# EAGLE board mainboard_eurobotics2010_r3 (EAGLE 4.16)
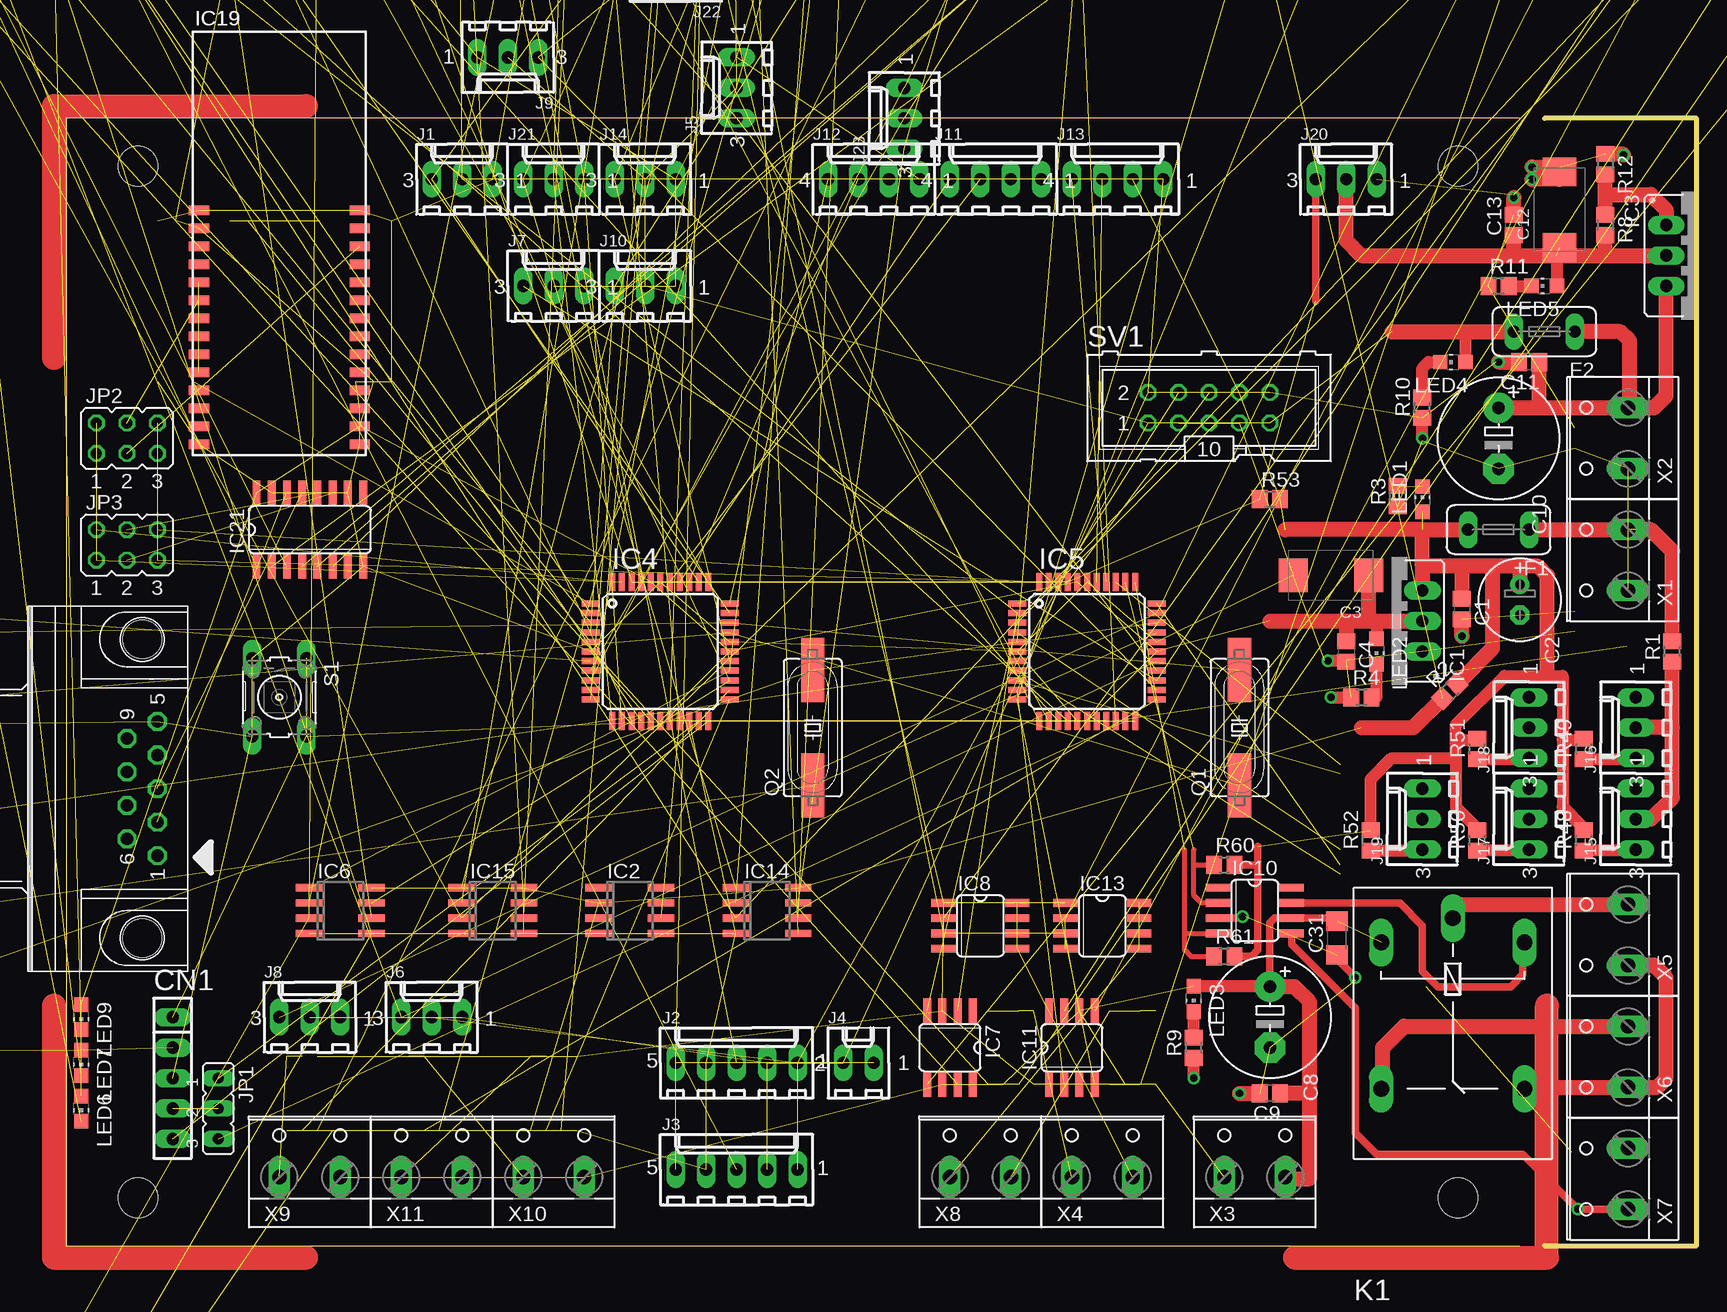
[diagram p0: board, top side]
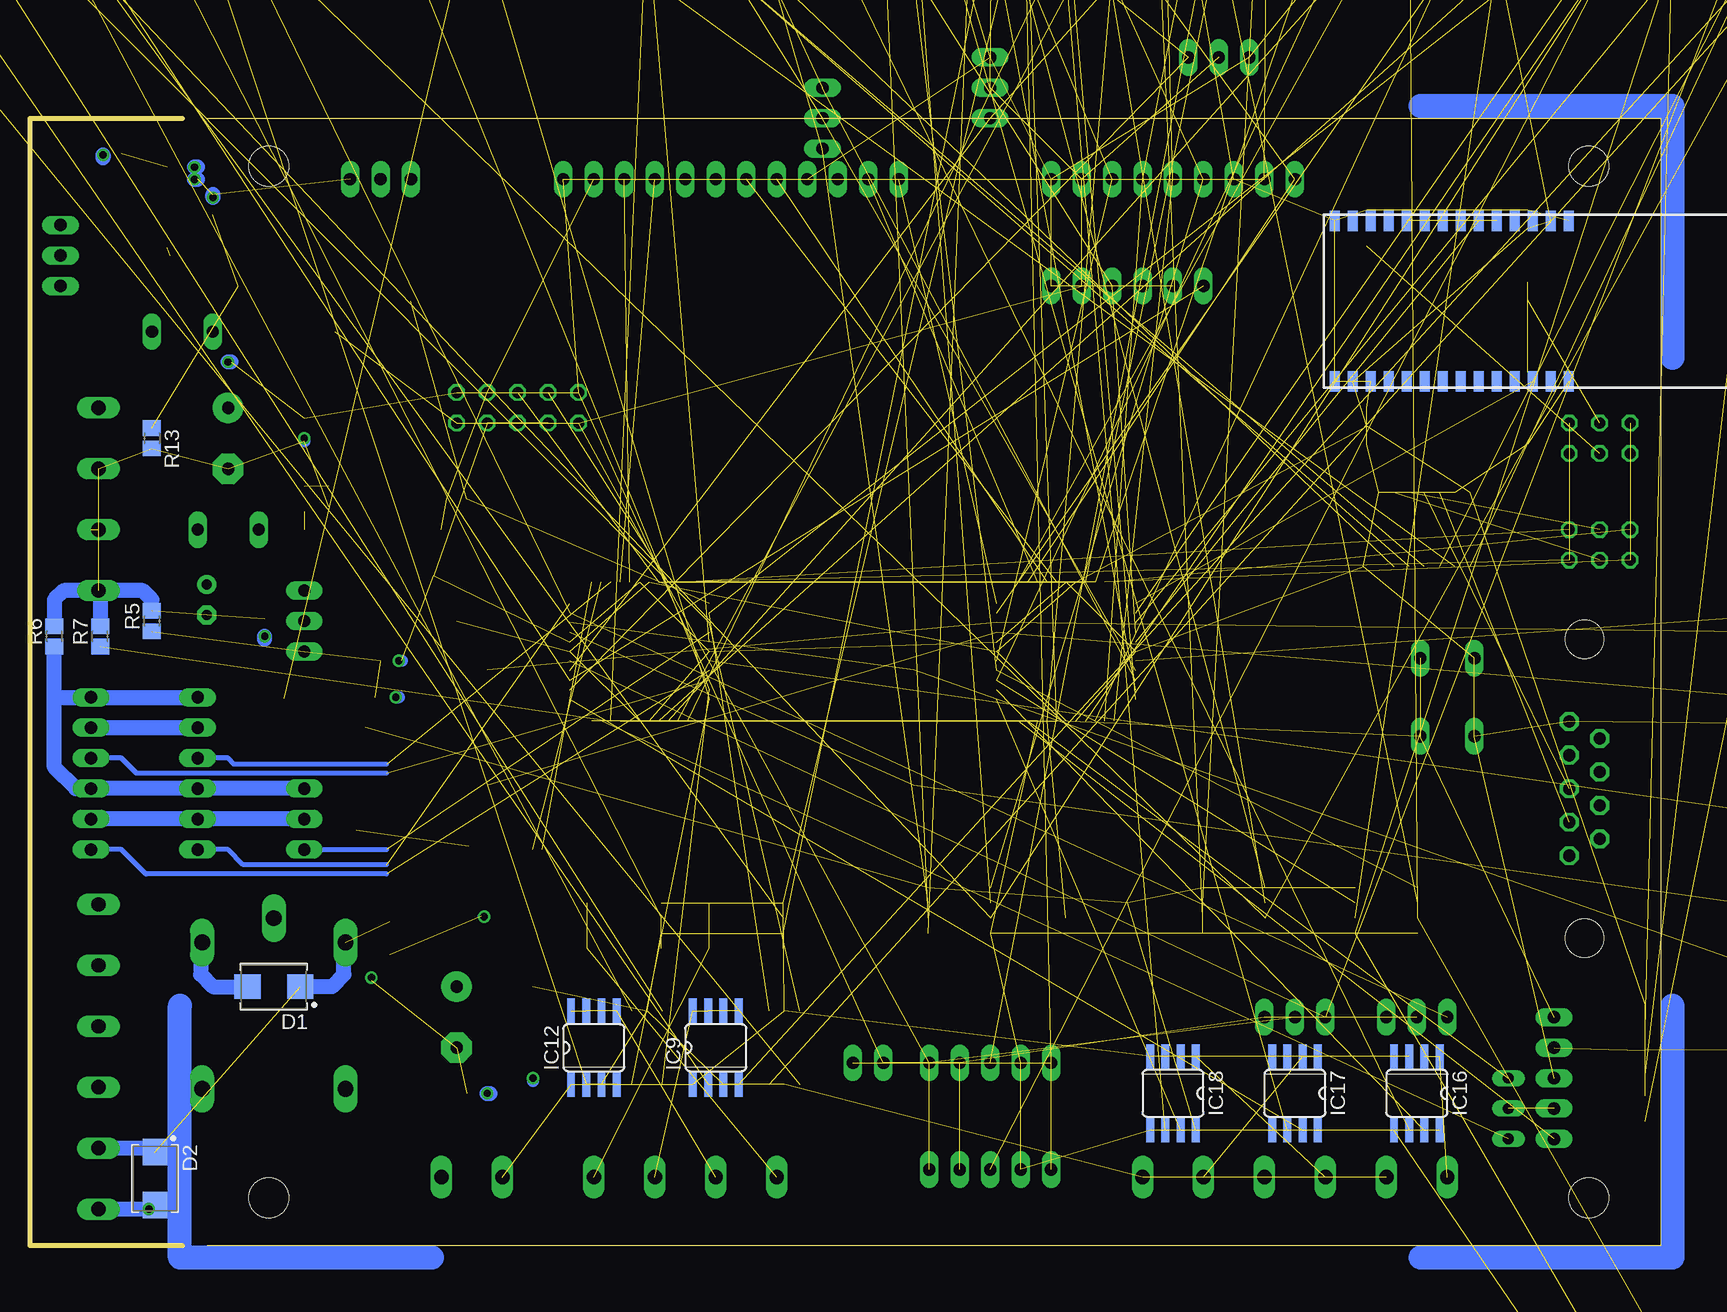
[diagram p1: board, bottom side, seen from below]

Size 135.89 x 94 mm. Coordinates in mm from the lower left corner, seen from the top.
Outline: 121.13,0 0,0 0,94 121.13,94
Outline: 123.19,0 135.89,0 135.89,93.98 123.19,93.98
Copper layers (1*16): Top 0.035mm / dielectric 1.5mm / Bottom 0.035mm
Design rules "olimex": minimum track width 10mil, minimum drill 24mil, track to track 8mil, track to pad 8mil, pad to pad 8mil, via to via 8mil, smd to smd 8mil, copper to edge 40mil, drill to drill 8mil, minimum pad ring 8mil, minimum via ring 8mil, stop-mask expansion 4mil, vias tented up to drill 0mil, thermal gap 10mil
Holes 3.3 mm at 6,4 116,4 6,90 116,90 172,110

## Footprints (pad centres in the part's own frame; a part is rotated, then mirrored left to right if it is on the bottom)
C0805 = smd 1.3 x 1.5: 1 -0.85,0; 2 0.85,0
E2,5-7 = drill 0.813 pad 1.6 round: + -1.27,0 | drill 0.813 pad 1.6 octagon: - 1.27,0
SMC_D = smd 2.4 x 2.8: + -3.15,0; - 3.15,0
C1206 = smd 1.6 x 1.8: 1 -1.4,0; 2 1.4,0
E5-10,5 = drill 1.016 pad 2.54 round: + -2.54,0 | drill 1.016 pad 2.54 octagon: - 2.54,0
C0603 = smd 1.1 x 1: 1 -0.85,0; 2 0.85,0
SMC_A = smd 1.6 x 1.4: + -1.5,0; - 1.5,0
SIP-100-5V = drill 1.016 long: 1 -5.08,0; 2 -2.54,0; 3 0,0; 4 2.54,0; 5 5.08,0
D-09F/90 = drill 1.016 pad 1.575 octagon: 1 -5.588,-1.27; 2 -2.794,-1.27; 3 0,-1.27; 4 2.794,-1.27; 5 5.588,-1.27; 6 -4.191,1.27; 7 -1.397,1.27; 8 1.397,1.27; 9 4.191,1.27 | hole 3.2: 12.446,0; -12.446,0
DIOM5436X265N = smd 2.2 x 2.05: A 2.2,0; K -2.2,0
TE5 = drill 1.016 long: 1 -2.54,0; 2 2.54,0
3,3 = hole 3.3: 0,0
317TS = drill 1.016 long: 1 -2.54,-2.54; 2 0,-2.54; 3 2.54,-2.54
SOIC8 = smd 0.6 x 2.2: 1 -1.905,-2.6; 2 -0.635,-2.6; 3 0.635,-2.6; 4 1.905,-2.6; 5 1.905,2.6; 6 0.635,2.6; 7 -0.635,2.6; 8 -1.905,2.6
TQFP44 = smd 1.5 x 0.5: 1 -5.8,4; 2 -5.8,3.2; 3 -5.8,2.4; 4 -5.8,1.6; 5 -5.8,0.8; 6 -5.8,0; 7 -5.8,-0.8; 8 -5.8,-1.6; 9 -5.8,-2.4; 10 -5.8,-3.2; 11 -5.8,-4; 23 5.8,-4; 24 5.8,-3.2; 25 5.8,-2.4; 26 5.8,-1.6; 27 5.8,-0.8; 28 5.8,0; 29 5.8,0.8; 30 5.8,1.6; 31 5.8,2.4; 32 5.8,3.2; 33 5.8,4 | smd 0.5 x 1.5: 12 -4,-5.8; 13 -3.2,-5.8; 14 -2.4,-5.8; 15 -1.6,-5.8; 16 -0.8,-5.8; 17 0,-5.8; 18 0.8,-5.8; 19 1.6,-5.8; 20 2.4,-5.8; 21 3.2,-5.8; 22 4,-5.8; 34 4,5.8; 35 3.2,5.8; 36 2.4,5.8; 37 1.6,5.8; 38 0.8,5.8; 39 0,5.8; 40 -0.8,5.8; 41 -1.6,5.8; 42 -2.4,5.8; 43 -3.2,5.8; 44 -4,5.8
SO08 = smd 0.6 x 2.2: 1 -1.905,-2.6; 2 -0.635,-2.6; 3 0.635,-2.6; 4 1.905,-2.6; 5 1.905,2.6; 6 0.635,2.6; 7 -0.635,2.6; 8 -1.905,2.6
SO08' = smd 0.66 x 2.032: 1 -1.905,-3.073; 2 -0.635,-3.073; 3 0.635,-3.073; 4 1.905,-3.073; 5 1.905,3.073; 6 0.635,3.073; 7 -0.635,3.073; 8 -1.905,3.073
WT11 = smd 1.7 x 0.8: 1 -6.7,2.5; 2 -6.7,1; 3 -6.7,-0.5; 4 -6.7,-2; 5 -6.7,-3.5; 6 -6.7,-5; 7 -6.7,-6.5; 8 -6.7,-8; 9 -6.7,-9.5; 10 -6.7,-11; 11 -6.7,-12.5; 12 -6.7,-14; 13 -6.7,-15.5; 14 -6.7,-17; 15 6.7,-17; 16 6.7,-15.5; 17 6.7,-14; 18 6.7,-12.5; 19 6.7,-11; 20 6.7,-9.5; 21 6.7,-8; 22 6.7,-6.5; 23 6.7,-5; 24 6.7,-3.5; 25 6.7,-2; 26 6.7,-0.5; 27 6.7,1; 28 6.7,2.5
SO16 = smd 0.66 x 2.032: 1 -4.445,-3.073; 2 -3.175,-3.073; 3 -1.905,-3.073; 4 -0.635,-3.073; 5 0.635,-3.073; 6 1.905,-3.073; 7 3.175,-3.073; 8 4.445,-3.073; 9 4.445,3.073; 10 3.175,3.073; 11 1.905,3.073; 12 0.635,3.073; 13 -0.635,3.073; 14 -1.905,3.073; 15 -3.175,3.073; 16 -4.445,3.073
6410-03 = drill 1.016 long: 1 2.54,0; 2 0,0; 3 -2.54,0
6410-05 = drill 1.016 long: 1 5.08,0; 2 2.54,0; 3 0,0; 4 -2.54,0; 5 -5.08,0
6410-02 = drill 1.016 long: 1 1.27,0; 2 -1.27,0
6410-04 = drill 1.016 long: 1 3.81,0; 2 1.27,0; 3 -1.27,0; 4 -3.81,0
JP2 = drill 0.914 long: 1 -2.54,0; 2 0,0; 3 2.54,0
JP3Q = drill 0.914 octagon: 1 -2.54,-1.27; 2 -2.54,1.27; 3 0,-1.27; 4 0,1.27; 5 2.54,-1.27; 6 2.54,1.27
G5LE = drill 1.321 long: 1 -7.493,-5.969; 2 -7.493,5.969; O 4.699,5.969; P -9.525,0; S 4.699,-5.969
CHIP-LED0805 = smd 1.2 x 1.2: A 0,-1.05; C 0,1.05
HC49UP = smd 5.334 x 1.93: 1 -4.826,0; 2 4.826,0
R0805 = smd 1.3 x 1.5: 1 -0.85,0; 2 0.85,0
B3F-10XX = drill 1.016 long: 1 -3.251,2.261; 2 3.251,2.261; 3 -3.251,-2.261; 4 3.251,-2.261
ML10 = drill 0.914 octagon: 1 -5.08,-1.27; 2 -5.08,1.27; 3 -2.54,-1.27; 4 -2.54,1.27; 5 0,-1.27; 6 0,1.27; 7 2.54,-1.27; 8 2.54,1.27; 9 5.08,-1.27; 10 5.08,1.27
W237-132 = drill 1.194 long: 1 -2.54,-0.635; 2 2.54,-0.635

## Placement (x,y rotation side)
C1  100nF  [C0805]  116.33,53.09 270 top
C2  220uF/10V  [E2,5-7]  121.16,53.85 270 top
C3  47uF/6V  [SMC_D]  105.41,55.88 180 top
C4  100nF  [C0805]  106.68,49.53 270 top
C5  10uF/10V  [C1206]  96.52,128.27 0 top  (outside the outline)
C6  100nF  [C0805]  31.75,167.64 0 top  (outside the outline)
C7  100nF  [C0805]  20.32,167.64 0 top  (outside the outline)
C8  220uF/35V  [E5-10,5]  100.33,19.05 270 top
C9  100nF  [C0805]  100.33,12.7 180 top
C10  220uF/35V  [E5-10,5]  119.38,67.31 270 top
C11  100nF  [C0805]  121.92,73.66 180 top
C12  47uF/16V  [SMC_D]  124.46,86.36 90 top
C13  100nF  [C0805]  120.65,85.09 90 top
C14  100nF  [C0603]  -36.83,39.37 0 top  (outside the outline)
C15  10uF/6V/lowESR  [SMC_A]  -36.83,54.61 0 top  (outside the outline)
C16  100nF  [C0603]  -36.83,46.99 0 top  (outside the outline)
C17  22pF  [C0805]  -36.83,43.18 0 top  (outside the outline)
C18  22pF  [C0805]  -36.83,50.8 0 top  (outside the outline)
C19  100nF  [C0603]  -36.83,35.56 0 top  (outside the outline)
C20  100nF  [C0603]  -36.83,27.94 0 top  (outside the outline)
C21  10uF/6V/lowESR  [SMC_A]  -36.83,31.75 0 top  (outside the outline)
C22  100nF  [C0603]  -36.83,16.51 0 top  (outside the outline)
C23  22pF  [C0805]  -36.83,24.13 0 top  (outside the outline)
C24  22pF  [C0805]  -36.83,12.7 0 top  (outside the outline)
C25  100nF  [C0603]  -36.83,20.32 0 top  (outside the outline)
C26  C1  [C0805]  -40.64,-81.28 0 top  (outside the outline)
C27  100nF  [C0805]  -25.4,167.64 0 top  (outside the outline)
C28  10uF/10V  [C1206]  85.09,128.27 0 top  (outside the outline)
C29  C1  [C0805]  -40.64,-88.9 0 top  (outside the outline)
C30  10uF/35V  [C1206]  50.8,128.27 0 top  (outside the outline)
C31  10uF/35V  [C1206]  105.92,25.65 90 top
C32  10uF/35V  [C1206]  39.37,128.27 0 top  (outside the outline)
C33  100nF  [C0805]  134.62,175.26 0 top  (outside the outline)
C34  100nF  [C0805]  123.19,175.26 0 top  (outside the outline)
C35  10uF/10V  [C1206]  73.66,128.27 0 top  (outside the outline)
C36  10uF/10V  [C1206]  62.23,128.27 0 top  (outside the outline)
C37  100nF  [C0805]  111.76,175.26 0 top  (outside the outline)
C38  100nF  [C0805]  100.33,175.26 0 top  (outside the outline)
C39  100nF  [C0805]  88.9,175.26 0 top  (outside the outline)
C40  100nF  [C0805]  77.47,175.26 0 top  (outside the outline)
C41  100nF  [C0805]  66.04,175.26 0 top  (outside the outline)
C42  100nF  [C0805]  54.61,175.26 0 top  (outside the outline)
C43  100nF  [C0603]  -36.83,167.64 0 top  (outside the outline)
C44  100nF  [C0603]  180.34,175.26 0 top  (outside the outline)
C45  100nF  [C0603]  168.91,175.26 0 top  (outside the outline)
C46  100nF  [C0603]  157.48,175.26 0 top  (outside the outline)
C47  100nF  [C0603]  146.05,175.26 0 top  (outside the outline)
CN1  [SIP-100-5V]  8.89,13.97 270 top
CON1  [D-09F/90]  6.35,38.1 90 top
D1  SS24  [DIOM5436X265N]  115.57,21.59 180 bottom
D2  SS24  [DIOM5436X265N]  125.48,5.59 270 bottom
F1  FUSETE5  [TE5]  119.38,59.69 180 top
F2  FUSETE5  [TE5]  123.19,76.2 180 top
H1  MOUNT-HOLE3.3  [3,3]  -39.37,-10.16 0 top  (outside the outline)
H2  MOUNT-HOLE3.3  [3,3]  -39.37,-19.05 0 top  (outside the outline)
H3  MOUNT-HOLE3.3  [3,3]  -39.37,-27.94 0 top  (outside the outline)
H4  MOUNT-HOLE3.3  [3,3]  -39.37,-36.83 0 top  (outside the outline)
H5  MOUNT-HOLE3.3  [3,3]  -39.37,-45.72 0 top  (outside the outline)
H6  MOUNT-HOLE3.3  [3,3]  -39.37,-54.61 0 top  (outside the outline)
H7  MOUNT-HOLE3.3  [3,3]  -39.37,-63.5 0 top  (outside the outline)
H8  MOUNT-HOLE3.3  [3,3]  -39.37,-72.39 0 top  (outside the outline)
IC1  LM1086CT-3.3  [317TS]  110.49,52.07 90 top
IC2  ADR443BRZ-R-8  [SOIC8]  46.99,27.94 270 top
IC3  LM338T  [317TS]  135.89,82.55 270 top
IC4  DSPIC33FJXXMC804SMD  [TQFP44]  49.53,49.53 0 top
IC5  DSPIC33FJXXMC804SMD  [TQFP44]  85.09,49.53 0 top
IC6  MCP6022SN  [SO08]  22.86,27.94 270 top
IC7  TC4427  [SO08']  73.66,16.51 180 top
IC8  IRF7389  [SO08']  76.2,26.67 270 top
IC9  IRF7389  [SO08']  78.74,16.51 0 bottom
IC10  TC4427  [SO08']  99.06,27.94 270 top
IC11  TC4427  [SO08']  83.82,16.51 0 top
IC12  IRF7389  [SO08']  88.9,16.51 0 bottom
IC13  IRF7389  [SO08']  86.36,26.67 270 top
IC14  MCP6022SN  [SO08]  58.42,27.94 270 top
IC15  MCP6022SN  [SO08]  35.56,27.94 270 top
IC16  ADS713  [SO08']  20.32,12.7 180 bottom
IC17  ADS713  [SO08']  30.48,12.7 180 bottom
IC18  ADS713  [SO08']  40.64,12.7 180 bottom
IC19  WT11A  [WT11]  17.78,83.82 0 top
IC20  WT11A  [WT11]  10.16,78.74 270 bottom
IC21  MAX232ACSE  [SO16]  20.32,59.69 0 top
J1  [6410-03]  33.02,88.9 0 top
J2  [6410-05]  55.88,15.24 0 top
J3  [6410-05]  55.88,6.35 0 top
J4  [6410-02]  66.04,15.24 0 top
J5  [6410-03]  55.88,96.52 90 top
J6  [6410-03]  30.48,19.05 0 top
J7  [6410-03]  40.64,80.01 0 top
J8  [6410-03]  20.32,19.05 0 top
J9  [6410-03]  36.83,99.06 180 top  (outside the outline)
J10  [6410-03]  48.26,80.01 0 top
J11  [6410-04]  77.47,88.9 0 top
J12  [6410-04]  67.31,88.9 0 top
J13  [6410-04]  87.63,88.9 0 top
J14  [6410-03]  48.26,88.9 0 top
J15  [6410-03]  130.81,35.56 90 top
J16  [6410-03]  130.81,43.18 90 top
J17  [6410-03]  121.92,35.56 90 top
J18  [6410-03]  121.92,43.18 90 top
J19  [6410-03]  113.03,35.56 90 top
J20  [6410-03]  106.68,88.9 0 top
J21  [6410-03]  40.64,88.9 0 top
J22  [6410-03]  50.8,106.68 180 top  (outside the outline)
J23  [6410-03]  69.85,93.98 90 top
JP1  [JP2]  12.7,11.43 270 top
JP2  [JP3Q]  5.08,67.31 0 top
JP3  [JP3Q]  5.08,58.42 0 top
K1  G5LE  [G5LE]  115.57,17.78 270 top
LED1  [CHIP-LED0805]  113.03,62.23 0 top
LED2  [CHIP-LED0805]  109.22,49.53 180 top
LED3  [CHIP-LED0805]  93.98,20.57 180 top
LED4  [CHIP-LED0805]  115.57,73.66 90 top
LED5  [CHIP-LED0805]  123.19,80.01 90 top
LED6  [CHIP-LED0805]  1.27,11.43 180 top
LED7  [CHIP-LED0805]  1.27,15.24 180 top
LED8  [CHIP-LED0805]  15.24,116.84 0 top  (outside the outline)
LED9  [CHIP-LED0805]  1.27,19.05 180 top
LED10  [CHIP-LED0805]  21.59,116.84 0 top  (outside the outline)
Q1  10MHz  [HC49UP]  97.79,43.18 90 top
Q2  10MHz  [HC49UP]  62.23,43.18 90 top
R1  0R  [R0805]  133.86,49.53 90 top
R2  0R  [R0805]  115.32,46.23 45 top
R3  470R  [R0805]  111,62.48 90 top
R4  270R  [R0805]  107.95,45.72 0 top
R5  0R  [R0805]  125.73,52.07 90 bottom
R6  0R  [R0805]  133.86,50.8 90 bottom
R7  0R  [R0805]  130.05,50.8 90 bottom
R8  240R/1%  [R0805]  128.27,85.09 270 top
R9  2K7  [R0805]  93.98,16.51 90 top
R10  1K  [R0805]  113.03,69.85 90 top
R11  1K  [R0805]  119.38,80.01 0 top
R12  1K6/1%  [R0805]  128.27,90.17 270 top
R13  0R  [R0805]  125.73,67.31 270 bottom
R14  270R  [R0805]  -25.4,137.16 0 top  (outside the outline)
R15  270R  [R0805]  -13.97,137.16 0 top  (outside the outline)
R16  4K7  [R0805]  20.32,137.16 0 top  (outside the outline)
R17  4K7  [R0805]  31.75,137.16 0 top  (outside the outline)
R18  270R  [R0805]  8.89,137.16 0 top  (outside the outline)
R19  270R  [R0805]  -2.54,137.16 0 top  (outside the outline)
R20  0R  [R0805]  43.18,137.16 0 top  (outside the outline)
R21  10K  [R0805]  54.61,137.16 0 top  (outside the outline)
R22  4K7  [R0805]  66.04,137.16 0 top  (outside the outline)
R23  270R  [R0805]  88.9,152.4 0 top  (outside the outline)
R24  0R  [R0805]  77.47,152.4 0 top  (outside the outline)
R25  RD  [R0805]  66.04,144.78 0 top  (outside the outline)
R26  10K  [R0805]  54.61,144.78 0 top  (outside the outline)
R27  RC  [R0805]  43.18,144.78 0 top  (outside the outline)
R28  RA  [R0805]  31.75,144.78 0 top  (outside the outline)
R29  RB  [R0805]  20.32,144.78 0 top  (outside the outline)
R30  RD  [R0805]  8.89,144.78 0 top  (outside the outline)
R31  RC  [R0805]  -2.54,144.78 0 top  (outside the outline)
R32  RA  [R0805]  -13.97,144.78 0 top  (outside the outline)
R33  RB  [R0805]  -25.4,144.78 0 top  (outside the outline)
R34  4K7  [R0805]  -13.97,160.02 0 top  (outside the outline)
R35  4K7  [R0805]  -2.54,160.02 0 top  (outside the outline)
R36  4K7  [R0805]  -36.83,160.02 0 top  (outside the outline)
R37  4K7  [R0805]  -25.4,160.02 0 top  (outside the outline)
R38  4K7  [R0805]  168.91,167.64 0 top  (outside the outline)
R39  4K7  [R0805]  180.34,167.64 0 top  (outside the outline)
R40  4K7  [R0805]  146.05,167.64 0 top  (outside the outline)
R41  4K7  [R0805]  157.48,167.64 0 top  (outside the outline)
R42  4K7  [R0805]  123.19,167.64 0 top  (outside the outline)
R43  4K7  [R0805]  134.62,167.64 0 top  (outside the outline)
R44  4K7  [R0805]  100.33,167.64 0 top  (outside the outline)
R45  4K7  [R0805]  111.76,167.64 0 top  (outside the outline)
R46  4K7  [R0805]  77.47,167.64 0 top  (outside the outline)
R47  4K7  [R0805]  88.9,167.64 0 top  (outside the outline)
R48  4K7  [R0805]  126.49,33.78 90 top
R49  4K7  [R0805]  126.49,41.4 90 top
R50  4K7  [R0805]  117.6,33.78 90 top
R51  4K7  [R0805]  117.6,41.4 90 top
R52  4K7  [R0805]  108.71,33.78 90 top
R53  4K7  [R0805]  100.33,62.23 0 top
R54  2K2  [R0805]  -36.83,144.78 0 top  (outside the outline)
R55  2K2  [R0805]  180.34,152.4 0 top  (outside the outline)
R56  22R  [R0805]  -36.83,137.16 0 top  (outside the outline)
R57  22R  [R0805]  180.34,144.78 0 top  (outside the outline)
R58  2K2  [R0805]  168.91,144.78 0 top  (outside the outline)
R59  2K2  [R0805]  157.48,144.78 0 top  (outside the outline)
R60  2K2  [R0805]  96.52,31.75 0 top
R61  2K2  [R0805]  96.52,24.13 0 top
R62  2K2  [R0805]  123.19,152.4 0 top  (outside the outline)
R63  2K2  [R0805]  111.76,152.4 0 top  (outside the outline)
R64  22R  [R0805]  168.91,152.4 0 top  (outside the outline)
R65  22R  [R0805]  157.48,152.4 0 top  (outside the outline)
R66  0R  [R0805]  146.05,144.78 0 top  (outside the outline)
R67  2K2  [R0805]  146.05,152.4 0 top  (outside the outline)
R68  2K2  [R0805]  134.62,152.4 0 top  (outside the outline)
R69  10K/1%  [R0805]  66.04,152.4 0 top  (outside the outline)
R70  10K/1%  [R0805]  54.61,152.4 0 top  (outside the outline)
R71  4K7  [R0805]  43.18,152.4 0 top  (outside the outline)
R72  4K7  [R0805]  31.75,152.4 0 top  (outside the outline)
R73  4K7  [R0805]  20.32,152.4 0 top  (outside the outline)
R74  4K7  [R0805]  8.89,152.4 0 top  (outside the outline)
R75  10K/1%  [R0805]  -2.54,152.4 0 top  (outside the outline)
R76  10K/1%  [R0805]  -13.97,152.4 0 top  (outside the outline)
R77  10K/1%  [R0805]  -25.4,152.4 0 top  (outside the outline)
R78  10K/1%  [R0805]  -36.83,152.4 0 top  (outside the outline)
R79  10K/1%  [R0805]  180.34,160.02 0 top  (outside the outline)
R80  10K/1%  [R0805]  168.91,160.02 0 top  (outside the outline)
R81  0R  [R0805]  157.48,160.02 0 top  (outside the outline)
R82  0R  [R0805]  146.05,160.02 0 top  (outside the outline)
R83  0R  [R0805]  134.62,160.02 0 top  (outside the outline)
R84  0R  [R0805]  123.19,160.02 0 top  (outside the outline)
R85  4K7  [R0805]  111.76,160.02 0 top  (outside the outline)
R86  4K7  [R0805]  100.33,160.02 0 top  (outside the outline)
R87  10K/1%  [R0805]  88.9,160.02 0 top  (outside the outline)
R88  1K/1%  [R0805]  77.47,160.02 0 top  (outside the outline)
R89  10K/1%  [R0805]  66.04,160.02 0 top  (outside the outline)
R90  10K/1%  [R0805]  54.61,160.02 0 top  (outside the outline)
R91  2K/1%  [R0805]  43.18,160.02 0 top  (outside the outline)
R92  10K/1%  [R0805]  31.75,160.02 0 top  (outside the outline)
R93  0R  [R0805]  20.32,160.02 0 top  (outside the outline)
R94  0R  [R0805]  8.89,160.02 0 top  (outside the outline)
S1  [B3F-10XX]  17.78,45.72 270 top
SV1  [ML10]  95.25,69.85 0 top
X1  [W237-132]  129.54,57.15 90 top
X2  [W237-132]  129.54,67.31 90 top
X3  [W237-132]  99.06,6.35 0 top
X4  [W237-132]  86.36,6.35 0 top
X5  [W237-132]  129.54,25.91 90 top
X6  [W237-132]  129.54,15.75 90 top
X7  [W237-132]  129.54,5.59 90 top
X8  [W237-132]  76.2,6.35 0 top
X9  [W237-132]  20.32,6.35 0 top
X10  [W237-132]  40.64,6.35 0 top
X11  [W237-132]  30.48,6.35 0 top

## Library data of the parts
C1-C47 R1-R94 = rcl
CN1 = con-hdrs40
CON1 = connect
D1 D2 = ipc-7351-diode
F1 F2 = fuse
H1-H8 = holes
IC1 IC3 = v-reg
IC2 IC4 IC5 IC7-IC13 IC16-IC20 = eagle_jbs_lib
IC6 IC14 IC15 = linear
IC21 = maxim-10
J1-J23 = con-molex
JP1-JP3 = jumper
K1 = relay
LED1-LED10 = led
Q1 Q2 = crystal
S1 = switch-omron
SV1 = con-harting-ml
X1-X11 = con-wago-508

## Nets
0V: C8.- C9.2 C30.1 C31.1 C32.1 IC7.3 IC8.1 IC9.1 IC10.3 IC11.3 IC12.1 IC13.1 IC16.3 IC16.4 IC17.3 IC17.4 IC18.3 IC18.4 R9.1 R58.1 R59.1 R66.2 R67.1 R68.1 R81.2 R82.1 R83.2 R84.1 R93.2 R94.1 X3.1
+3V3: C3.+ C4.1 C14.1 C16.1 C19.1 C20.1 C22.1 C25.1 C44.2 C45.2 CN1.2 IC1.2 IC4.17 IC4.28 IC4.40 IC5.17 IC5.28 IC5.40 IC19.2 IC19.16 IC20.2 IC20.16 IC21.16 LED2.A LED6.A LED7.A LED8.A LED9.A LED10.A R21.2
+3V_VREF: C7.1 IC2.6 IC4.19 IC5.19 R27.1 R31.1 R88.2
+5V: C1.1 C2.+ F1.2 IC1.3 J1.2 J11.2 J12.2 J13.2 LED1.A R2.2 R16.2 R17.2 R22.2 R35.2 R37.2 R39.2 R41.2 R43.2 R45.2 R47.2 R48.2 R49.2 R50.2 R51.2 R52.2 R53.2 R54.2 R55.2 R60.2 R61.2 R62.2 R63.2 R71.2 R72.2 R73.2 R74.2 R85.2 R86.2 SV1.8
+5V_ANALOG: C5.1 C6.1 C27.1 C28.2 C33.1 C34.1 C35.2 C36.2 C37.2 C39.2 C41.2 IC2.2 IC6.8 IC14.8 IC15.8 IC16.8 IC17.8 IC18.8 R2.1
+12V: F2.2 J2.1 J3.1 J5.2 J6.2 J7.2 J8.2 J9.2 J10.2 J14.2 LED4.A R26.2 SV1.1 SV1.9
+24V: C8.+ C9.1 C30.2 C31.2 C32.2 D1.K D2.K IC7.6 IC8.3 IC9.3 IC10.6 IC11.6 IC12.3 IC13.3 K1.1 LED3.A X3.2 X7.2 X9.2 X10.2 X11.2
AGND: C5.2 C6.2 C7.2 C26.2 C27.2 C28.1 C29.2 C33.2 C34.2 C35.1 C36.1 C37.1 C38.1 C39.1 C40.1 C41.1 C42.1 IC2.4 IC4.20 IC5.20 IC6.4 IC14.4 IC15.4 IC16.5 IC17.5 IC18.5 J2.4 J3.4 R7.1 R20.1 R24.1 R29.1 R33.1 R81.1 R83.1 R91.1 R93.1
ARM_ENC_CHA: IC5.38 J13.3
ARM_ENC_CHB: IC5.37 J13.4
ARM_MOT_BREAK_(5V): IC5.13 J22.1 R74.1
ARM_MOT_CURRENT: IC5.23 IC17.7
ARM_MOT_REV_(5V): IC5.12 J22.2 R73.1
ARM_MOT_VREF_N: IC5.15 R78.1
ARM_MOT_VREF_P: IC5.14 R76.1
ARM_VREF: IC15.1 J22.3 R70.2
BEACON_UART_RX: IC4.1 IC20.26
BEACON_UART_TX: IC4.5 IC20.6
COMPRESSOR_POWER: IC5.35 IC10.2 R60.1
CORN_INSIDE_SENSOR: IC5.25 J7.3 R38.2 R39.1
CORN_PUSH_PWM_(5V): IC5.4 J19.3 R52.1
FROM_TX_RS232_M: CON1.3 IC21.13
G_RST: CN1.1 IC4.18 IC5.18 R21.1 S1.1 S1.2
GND: C3.- C4.2 C14.2 C15.- C16.2 C17.2 C18.2 C19.2 C20.2 C21.- C22.2 C23.2 C24.2 C25.2 C45.1 C47.1 CN1.3 CON1.5 IC1.1 IC4.6 IC4.16 IC4.29 IC4.39 IC5.6 IC5.16 IC5.29 IC5.39 IC19.1 IC19.14 IC19.15 IC19.17 IC19.28 IC20.1 IC20.14 IC20.15 IC20.17 IC20.28 IC21.8 IC21.10 IC21.15 J1.1 R4.1 R5.1 R20.2 R24.2 R66.1 R82.2 R84.2 R94.2 S1.3 S1.4 SV1.3 SV1.5 SV1.7
GND_SERVO_5V: J15.1 J16.1 J17.1 J18.1 J19.1 R6.1
GND_SERVO_9.6V: C12.- C13.2 J20.1 R11.1 R12.1 R13.1
GNDIO: C1.2 C2.- C10.- C11.2 J2.2 J3.2 J4.2 J5.1 J6.1 J7.1 J8.1 J9.1 J10.1 J11.1 J12.1 J13.1 J14.1 R3.1 R5.2 R6.2 R7.2 R10.1 R13.2 R34.1 R36.1 R38.1 R40.1 R42.1 R44.1 R46.1 SV1.2 SV1.10 X1.1 X2.1
I2C_SCL_(5V): IC4.42 IC5.42 R16.1 SV1.4
I2C_SDA_(5V): IC4.41 IC5.41 R17.1 SV1.6
L_BALL_IN_SENSOR: IC5.27 J6.3 R36.2 R37.1
L_BALLS_LID_PWM_(5V): IC5.9 J16.3 R49.1
L_CORN_HOLD_PWM_(5V): IC5.36 J18.3 R51.1
L_CORN_MOT_INA_(5V): IC5.10 IC11.2 R62.1
L_CORN_MOT_INB_(5V): IC5.11 IC11.4 R63.1
L_ENC_CHA: IC4.36 J12.3
L_ENC_CHB: IC4.33 J12.4
L_MOT_BREAK_(5V): IC4.13 J21.1 R72.1
L_MOT_CURRENT: IC4.24 IC16.7
L_MOT_REV_(5V): IC4.12 J21.2 R71.1
L_MOT_VREF: IC14.1 J21.3 R69.2
L_MOT_VREF_N: IC4.15 R77.1
L_MOT_VREF_P: IC4.14 R75.1
L_WALL_SENSOR: IC4.4 J10.3 R44.2 R45.1
LASER_BALL_SCAN: IC4.26 IC6.1 R25.2
LASER_CORN_SCAN: IC4.25 IC6.7 R30.2
MAIN_LED1: IC4.34 R18.1
MAIN_LED2: IC4.32 R19.1
MAIN_LED3: IC4.2 R15.1
MAIN_LED4: IC4.3 R14.1
MAIN_PGED: IC4.21 JP1.1
MAIN_UART_RX: IC4.44 JP2.1 JP3.2
MAIN_UART_TX: IC4.43 JP2.2 JP3.1
N$1: LED10.C R23.2
N$2: IC8.5 IC8.6 IC8.7 IC8.8 X4.2
N$3: IC3.1 R8.1 R12.2
N$4: IC9.5 IC9.6 IC9.7 IC9.8 X4.1
N$5: J2.3 R28.1
N$6: IC8.2 IC8.4 R57.2 R59.2
N$7: IC9.2 IC9.4 R56.2 R58.2
N$8: LED8.C R18.2
N$10: LED9.C R19.2
N$11: LED7.C R15.2
N$12: LED5.C R11.2
N$13: LED6.C R14.2
N$14: IC7.7 R56.1
N$15: IC7.5 R57.1
N$16: IC20.5 IC20.10
N$17: IC12.5 IC12.6 IC12.7 IC12.8 X8.2
N$18: IC13.5 IC13.6 IC13.7 IC13.8 X8.1
N$19: IC12.2 IC12.4 R65.2 R68.2
N$20: IC13.2 IC13.4 R64.2 R67.2
N$21: IC11.7 R64.1
N$22: IC11.5 R65.1
N$23: D1.A IC10.7 K1.2
N$24: K1.O X5.1 X6.1
N$26: K1.P X5.2
N$27: C43.2 IC21.1
N$30: C43.1 IC21.3
N$31: C46.2 IC21.4
N$32: C46.1 IC21.5
N$33: C44.1 IC21.2
N$34: C47.2 IC21.6
N$35: K1.S X6.2
N$36: IC6.2 R25.1 R27.2
N$38: D2.A IC10.5 X7.1
N$40: C26.1 IC6.3 R28.2 R29.2
N$43: C10.+ C11.1 F2.1 IC3.3 X2.2
N$47: C18.1 IC4.31 Q1.2
N$48: C17.1 IC4.30 Q1.1
N$49: C15.+ IC4.7
N$50: C24.1 IC5.31 Q2.2
N$51: C23.1 IC5.30 Q2.1
N$52: C21.+ IC5.7
N$61: IC14.2 R69.1 R75.2
N$64: LED1.C R3.2
N$65: LED2.C R4.2
N$66: LED4.C R10.2
N$67: LED3.C R9.2
N$70: IC14.3 R77.2 R79.2
N$71: IC14.6 R87.1 R89.2
N$72: IC16.1 IC16.2 X9.1
N$73: C38.2 IC16.6
N$74: IC14.5 R90.2 R92.2
N$75: IC15.6 R88.1 R91.2
N$76: IC18.1 IC18.2 X11.1
N$77: C42.2 IC18.6
N$78: IC17.1 IC17.2 X10.1
N$79: C40.2 IC17.6
N$83: IC15.2 R70.1 R76.2
N$84: IC15.3 R78.2 R80.2
N$92: J2.5 J3.5 J4.1 R26.1
N$93: IC19.5 IC19.10
N$94: IC6.6 R30.1 R31.2
N$95: C29.1 IC6.5 R32.2 R33.2
N$96: J3.3 R32.1
N$112: F1.1 R1.2 X1.2
PGEC: CN1.5 IC4.22 IC5.22
PGED: CN1.4 JP1.2
R_BALL_IN_SENSOR: IC5.26 J5.3 R34.2 R35.1
R_BALLS_LID_PWM_(5V): IC5.8 J15.3 R48.1
R_CORN_HOLD_PWM_(5V): IC5.33 J17.3 R50.1
R_CORN_MOT_INA_(5V): IC5.2 IC7.2 R54.1
R_CORN_MOT_INB_(5V): IC5.3 IC7.4 R55.1
R_ENC_CHA: IC4.38 J11.3
R_ENC_CHB: IC4.37 J11.4
R_MOT_BREAK_(5V): IC4.9 J23.1 R86.1
R_MOT_CURRENT: IC4.23 IC18.7
R_MOT_REV_(5V): IC4.8 J23.2 R85.1
R_MOT_VREF: IC14.7 J23.3 R87.2
R_MOT_VREF_N: IC4.11 R90.1
R_MOT_VREF_P: IC4.10 R89.1
R_WALL_SENSOR: IC4.27 J14.3 R46.2 R47.1
RX_MAX232: IC21.12 JP3.4
RX_WT11: IC19.6 JP2.4
SERVOS_UART_(5V): IC5.1 J20.3 R53.1
SLAVE_LED1: IC5.5 R23.1
SLAVE_PGED: IC5.21 JP1.3
SLAVE_UART_RX: IC5.44 JP2.5 JP3.6
SLAVE_UART_TX: IC5.43 JP2.6 JP3.5
START: IC4.35 J1.3 R22.1
SUCKER_OBJ_SENSOR: IC5.24 J9.3 R42.2 R43.1
TO_RX_RS232_M: CON1.2 IC21.14
TX_MAX232: IC21.11 JP3.3
TX_WT11: IC19.26 JP2.3
VACUUM_REV: IC5.34 IC10.4 R61.1
VACUUM_SENSOR: IC5.32 J8.3 R40.2 R41.1
VCC_SERVO_5V: J15.2 J16.2 J17.2 J18.2 J19.2 R1.1
VCC_SERVO_9.6V: C12.+ C13.1 IC3.2 J20.2 LED5.A R8.2
VOFF_2V: IC15.5 IC15.7 R79.1 R80.1 R92.1

## Tracks (layer width: path | path; a pad name or v marks a point on that pad's centre or on a via)
0V  (via drill 0.61)  (28 unrouted)
  Top 0.61: C31.1 105.92,23.88 v107.44,22.35 | IC10.3 98.17,27.3 v98.04,27.43
  Top 1.016: v93.98,13.97 R9.1
  Top 1.27: v97.79,12.7 C9.2
  Bottom 0.61: v107.44,22.35 107.44,22.1 | v98.04,27.43 98.3,27.43
  Bottom 1.016: v93.98,13.97 93.98,13.72
  Bottom 1.27: v97.79,12.7 97.54,12.7
+3V3  (26 unrouted)
  Top 1.016: 109.22,52.07 LED2.A
  Top 1.27: 100.33,52.07 106.68,52.07 | 106.68,52.07 108.46,52.07 | 108.46,52.07 109.22,52.07 IC1.2 | C3.+ 108.56,52.17 108.46,52.07 | 106.68,52.07 C4.1
+3V_VREF  (6 unrouted)
+5V  (28 unrouted)
  Top 0.61: R61.2 98.81,24.13 99.31,24.64 99.31,31.75 | 99.31,31.75 99.31,33.27 | 99.31,31.75 R60.2
  Top 1.016: R50.2 117.6,34.8 115.82,36.58 115.82,40.64 | 115.82,40.64 115.82,42.16 | R52.2 108.71,38.86 110.49,40.64 115.82,40.64 | R48.2 126.49,34.8 124.71,36.58 124.71,42.16 | 124.71,42.16 124.71,47.5 123.44,47.5 119.89,47.5 115.82,43.43 115.82,42.16 | R49.2 126.49,42.16 124.71,42.16 | R51.2 117.6,42.16 115.82,42.16
  Top 1.27: 113.03,59.69 101.6,59.69 | 113.03,59.69 F1.2 | 113.03,56.64 113.03,59.69 | 113.03,56.64 IC1.3 | 121.16,56.64 C2.+ | 116.33,56.64 113.03,56.64 | 116.33,56.64 C1.1 | R2.2 118.87,49.78 118.87,56.64 | 118.87,56.64 116.33,56.64 | 121.16,56.64 118.87,56.64 | 123.44,47.5 123.44,55.88 122.68,56.64 121.16,56.64
+5V_ANALOG  (18 unrouted)
  Top 1.27: R2.1 112.27,43.18 107.95,43.18
+12V  (12 unrouted)
  Top 1.016: LED4.A 116.62,76.17 116.59,76.2
  Top 1.27: 110.49,76.2 116.59,76.2 F2.2
+24V  (13 unrouted)
  Top 0.61: C31.2 105.92,27.18 105.79,27.3 IC10.6 100.71,27.3 100.33,26.92 C8.+
  Top 1.016: LED3.A 100.36,21.62 C8.+ | X3.2 101.6,5.59
  Top 1.27: 103.63,12.7 103.63,5.59 101.6,5.59 | 103.63,12.7 103.63,20.32 102.36,21.59 C8.+ | 103.63,12.7 C9.1
  Bottom 1.27: D2.K 125.56,7.79 125.73,7.62 126.24,8.13 X7.2 | D1.K 110.74,21.59 109.73,22.61 109.73,25.15 K1.1
AGND  (36 unrouted)
ARM_ENC_CHA  (1 unrouted)
ARM_ENC_CHB  (1 unrouted)
ARM_MOT_BREAK_(5V)  (2 unrouted)
ARM_MOT_CURRENT  (1 unrouted)
ARM_MOT_REV_(5V)  (2 unrouted)
ARM_MOT_VREF_N  (1 unrouted)
ARM_MOT_VREF_P  (1 unrouted)
ARM_VREF  (2 unrouted)
BEACON_UART_RX  (1 unrouted)
BEACON_UART_TX  (1 unrouted)
COMPRESSOR_POWER  (1 unrouted)
  Top 0.406: IC10.2 94.61,28.57 93.98,29.21 93.98,31.75 | 93.98,31.75 93.98,33.02 | 93.98,31.75 R60.1
CORN_INSIDE_SENSOR  (3 unrouted)
CORN_PUSH_PWM_(5V)  (1 unrouted)
  Top 0.406: R52.1 108.71,33.02
  Top 1.016: R52.1 112.94,32.93 J19.3
  Bottom 0.406: J19.3 106.17,33.02
FROM_TX_RS232_M  (1 unrouted)
G_RST  (5 unrouted)
GND  (via drill 0.61)  (53 unrouted)
  Top 1.016: v105.41,45.72 R4.1 | C4.2 106.68,48.77 v105.16,48.77
  Bottom 1.016: v105.41,45.72 105.16,45.72 | v105.16,48.77 104.9,48.77
GND_SERVO_5V
  Bottom 1.27: 133.86,45.72 133.86,39.88 132.08,38.1 J15.1 J17.1 J19.1 | 133.86,45.72 R6.1 | 133.86,45.72 J16.1 J18.1
GND_SERVO_9.6V  (via drill 0.61)  (5 unrouted)
  Top 1.27: R12.1 129.71,91.02 v129.79,90.93 | C13.2 v120.65,87.38 | v122.17,88.9 124.46,88.9 C12.- 124.46,89.92 v122.17,89.92
  Bottom 1.27: v129.79,90.93 129.79,90.68 | v120.65,87.38 120.65,87.63 | v122.17,88.9 121.92,88.9 | v122.17,89.92 121.92,89.92
GNDIO  (via drill 0.61)  (30 unrouted)
  Top 1.016: v113.03,67.31 R10.1
  Top 1.27: v119.38,73.66 C11.2 | v116.33,50.8 C1.2
  Bottom 1.016: v113.03,67.31 113.03,67.06
  Bottom 1.27: 119.13,73.66 v119.38,73.66 | 116.33,50.55 v116.33,50.8 | 130.05,54.61 R7.2 | R5.2 125.73,53.85 126.49,54.61 130.05,54.61 | 130.05,54.61 X1.1 133.1,54.61 133.86,53.85 R6.2
I2C_SCL_(5V)  (3 unrouted)
I2C_SDA_(5V)  (3 unrouted)
L_BALL_IN_SENSOR  (3 unrouted)
L_BALLS_LID_PWM_(5V)  (1 unrouted)
  Top 0.406: R49.1 126.49,40.64
  Top 1.016: R49.1 130.72,40.55 J16.3
  Bottom 0.406: J16.3 128.27,40.64 127,39.37 106.17,39.37
L_CORN_HOLD_PWM_(5V)  (1 unrouted)
  Top 0.406: R51.1 117.6,40.64
  Top 1.016: R51.1 121.83,40.55 J18.3
  Bottom 0.406: J18.3 119.38,40.64 118.87,40.13 106.17,40.13
L_CORN_MOT_INA_(5V)  (2 unrouted)
L_CORN_MOT_INB_(5V)  (2 unrouted)
L_ENC_CHA  (1 unrouted)
L_ENC_CHB  (1 unrouted)
L_MOT_BREAK_(5V)  (2 unrouted)
L_MOT_CURRENT  (1 unrouted)
L_MOT_REV_(5V)  (2 unrouted)
L_MOT_VREF  (2 unrouted)
L_MOT_VREF_N  (1 unrouted)
L_MOT_VREF_P  (1 unrouted)
L_WALL_SENSOR  (3 unrouted)
LASER_BALL_SCAN  (2 unrouted)
LASER_CORN_SCAN  (2 unrouted)
MAIN_LED1  (1 unrouted)
MAIN_LED2  (1 unrouted)
MAIN_LED3  (1 unrouted)
MAIN_LED4  (1 unrouted)
MAIN_PGED  (1 unrouted)
MAIN_UART_RX  (2 unrouted)
MAIN_UART_TX  (2 unrouted)
N$1  (1 unrouted)
N$2  (4 unrouted)
N$3
  Top 1.27: R8.1 128.27,87.63 | IC3.1 133.35,86.36 132.08,87.63 128.27,87.63 | 128.27,87.63 R12.2
N$4  (4 unrouted)
N$5  (1 unrouted)
N$6  (3 unrouted)
N$7  (3 unrouted)
N$8  (1 unrouted)
N$10  (1 unrouted)
N$11  (1 unrouted)
N$12
  Top 1.016: R11.2 LED5.C
N$13  (1 unrouted)
N$14  (1 unrouted)
N$15  (1 unrouted)
N$16  (1 unrouted)
N$17  (4 unrouted)
N$18  (4 unrouted)
N$19  (3 unrouted)
N$20  (3 unrouted)
N$21  (1 unrouted)
N$22  (1 unrouted)
N$23
  Top 0.61: IC10.7 111.12,28.57 113.03,26.67 113.03,22.86 114.3,21.59 120.4,21.59 121.41,22.61 121.41,25.15 K1.2
  Bottom 1.27: D1.A 120.65,21.59 121.67,22.61 121.67,24.89 121.41,25.15 K1.2
N$24
  Top 1.27: K1.O 121.67,13.21 X6.1 132.59,13.21 133.35,13.97 133.35,22.35 132.33,23.37 X5.1 130.05,23.37
N$25
  Top 2: 20,-1 -1,-1 -1,20
N$26
  Top 1.27: X5.2 115.57,28.45 K1.P
N$27  (1 unrouted)
N$28
  Top 2: 102.4,-1 123.4,-1 123.4,20
N$29
  Top 2: 20,95 -1,95 -1,74
N$30  (1 unrouted)
N$31  (1 unrouted)
N$32  (1 unrouted)
N$33  (1 unrouted)
N$34  (1 unrouted)
N$35
  Top 1.27: X6.2 111.51,18.29 109.73,16.51 109.73,13.21 K1.S 109.47,12.95
N$36  (2 unrouted)
N$38  (via drill 0.61)
  Top 0.61: 130.3,3.05 X7.1 v125.98,3.05 121.41,7.62 109.22,7.62 107.44,9.4 107.44,19.81 102.13,25.12 IC10.5
  Bottom 1.27: D2.A 125.64,3.39 v125.98,3.05 130.05,3.05
N$39
  Bottom 2: 20,-1 -1,-1 -1,20
N$40  (3 unrouted)
N$41
  Bottom 2: 102.4,-1 123.4,-1 123.4,20
N$42
  Bottom 2: 20,95 -1,95 -1,74
N$43
  Top 1.27: IC3.3 133.35,70.87 132.33,69.85 130.3,69.85 | C10.+ 122.68,69.85 | 122.68,69.85 X2.2 130.3,69.85 | F2.1 129.54,76.2 130.3,75.44 130.3,69.85 | C11.1 122.77,69.94 122.68,69.85
N$47  (2 unrouted)
N$48  (2 unrouted)
N$49  (1 unrouted)
N$50  (2 unrouted)
N$51  (2 unrouted)
N$52  (1 unrouted)
N$61  (2 unrouted)
N$64  (1 unrouted)
N$65
  Top 1.016: R4.2 109.22,45.72 LED2.C
N$66
  Top 1.016: LED4.C 113.54,73.66 113.03,73.15 R10.2
N$67
  Top 1.016: R9.2 LED3.C
N$70  (2 unrouted)
N$71  (2 unrouted)
N$72  (2 unrouted)
N$73  (1 unrouted)
N$74  (2 unrouted)
N$75  (2 unrouted)
N$76  (2 unrouted)
N$77  (1 unrouted)
N$78  (2 unrouted)
N$79  (1 unrouted)
N$83  (2 unrouted)
N$84  (2 unrouted)
N$92  (3 unrouted)
N$93  (1 unrouted)
N$94  (2 unrouted)
N$95  (3 unrouted)
N$96  (1 unrouted)
N$112  (1 unrouted)
  Top 1.27: F1.1 X1.2 | R1.2 133.86,57.91 132.08,59.69 130.81,59.69
PGEC  (2 unrouted)
PGED  (1 unrouted)
R_BALL_IN_SENSOR  (3 unrouted)
R_BALLS_LID_PWM_(5V)  (1 unrouted)
  Top 0.406: R48.1 126.49,33.02
  Top 1.016: R48.1 130.72,32.93 J15.3
  Bottom 0.406: J15.3 128.27,33.02 126.24,30.99 106.17,30.99
R_CORN_HOLD_PWM_(5V)  (1 unrouted)
  Top 0.406: R50.1 117.6,33.02
  Top 1.016: R50.1 121.83,32.93 J17.3
  Bottom 0.406: J17.3 119.38,33.02 118.11,31.75 106.17,31.75
R_CORN_MOT_INA_(5V)  (2 unrouted)
R_CORN_MOT_INB_(5V)  (2 unrouted)
R_ENC_CHA  (1 unrouted)
R_ENC_CHB  (1 unrouted)
R_MOT_BREAK_(5V)  (2 unrouted)
R_MOT_CURRENT  (1 unrouted)
R_MOT_REV_(5V)  (2 unrouted)
R_MOT_VREF  (2 unrouted)
R_MOT_VREF_N  (1 unrouted)
R_MOT_VREF_P  (1 unrouted)
R_WALL_SENSOR  (3 unrouted)
RX_MAX232  (1 unrouted)
RX_WT11  (1 unrouted)
SERVOS_UART_(5V)  (2 unrouted)
  Top 0.61: 104.14,78.74 J20.3
SLAVE_LED1  (1 unrouted)
SLAVE_PGED  (1 unrouted)
SLAVE_UART_RX  (2 unrouted)
SLAVE_UART_TX  (2 unrouted)
START  (2 unrouted)
SUCKER_OBJ_SENSOR  (3 unrouted)
TO_RX_RS232_M  (1 unrouted)
TX_MAX232  (1 unrouted)
TX_WT11  (1 unrouted)
VACUUM_REV  (1 unrouted)
  Top 0.406: R61.1 93.73,24.13 93.22,24.64 93.22,26.16 | 93.22,26.16 93.22,33.02 | IC10.4 93.34,26.04 93.22,26.16
VACUUM_SENSOR  (3 unrouted)
VCC_SERVO_5V
  Top 1.27: 133.86,43.18 133.86,37.34 132.08,35.56 J15.2 | 133.86,43.18 R1.1 | 133.86,43.18 J16.2
  Bottom 1.27: J16.2 J18.2 | J15.2 J17.2 J19.2
VCC_SERVO_9.6V  (1 unrouted)
  Top 1.016: 124.24,82.52 LED5.A
  Top 1.27: 120.65,82.55 124.21,82.55 | 124.21,82.55 128.27,82.55 | 128.27,82.55 IC3.2 | 124.21,82.55 124.24,82.52 | 128.27,82.55 R8.2 | 120.65,82.55 C13.1 | 120.65,82.55 107.95,82.55 106.68,83.82 J20.2
VOFF_2V  (4 unrouted)